# EAGLE board Steering Wheel LED Left (EAGLE 7.2.0)
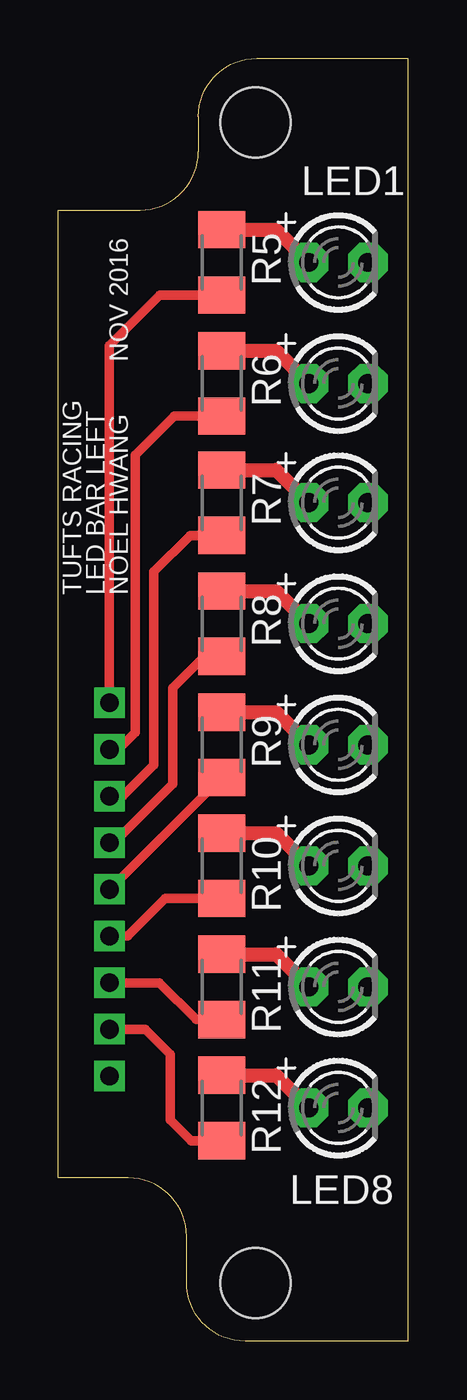
[diagram p0: board, top side]
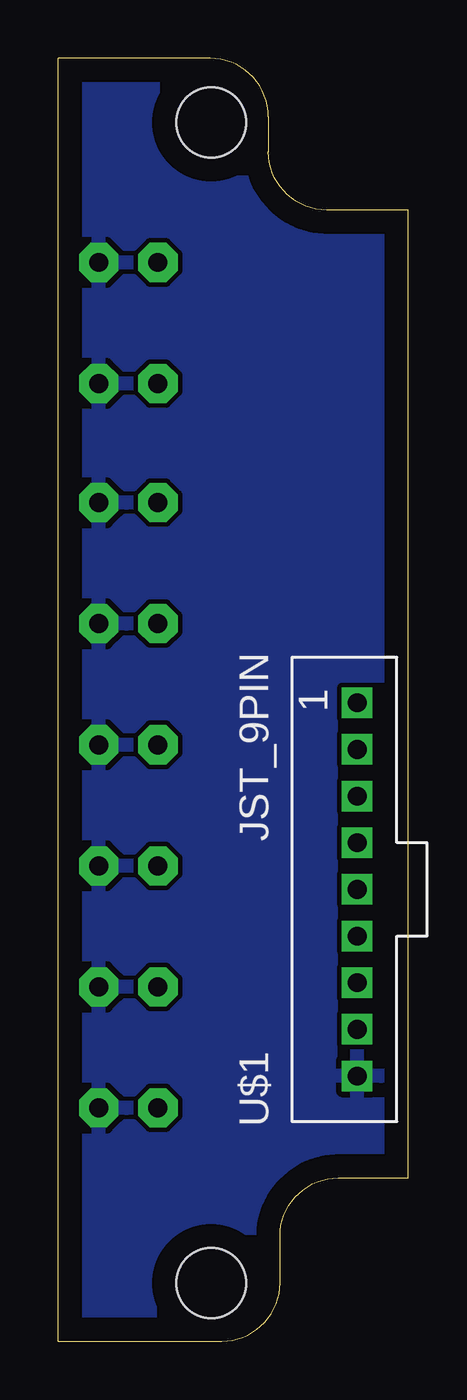
[diagram p1: board, bottom side, seen from below]

Size 15 x 55 mm. Coordinates in mm from the lower left corner, seen from the top.
Outline: 15,0 15,55 8.5,55 arc90 6,52.5 6,51 arc-90 3.5,48.5 0,48.5 0,7 3,7 arc-90 5.5,4.5 5.5,2.5 arc90 8,0 15,0
Copper layers (1*16): Top 0.035mm / dielectric 1.5mm / Bottom 0.035mm
Design rules "default": minimum track width 10mil, minimum drill 24mil, track to track 8mil, track to pad 8mil, pad to pad 8mil, via to via 8mil, smd to smd 8mil, copper to edge 40mil, drill to drill 8mil, minimum pad ring 10mil, minimum via ring 8mil, stop-mask expansion 4mil, vias tented up to drill 0mil, thermal gap 10mil
Holes 3 mm at 8.45,2.49 8.45,52.25

## Footprints (pad centres in the part's own frame; a part is rotated, then mirrored left to right if it is on the bottom)
LED3MM = drill 0.813 pad 1.676 octagon: A -1.27,0; K 1.27,0
M1206 = smd 1.6 x 2: 1 -1.4,0; 2 1.4,0
JST-PH-9-THM = drill 0.8 square: 1 8,0; 2 6,0; 3 4,0; 4 2,0; 5 0,0; 6 -2,0; 7 -4,0; 8 -6,0; 9 -8,0

## Placement (x,y rotation side)
LED1  [LED3MM]  12,46.25 0 top
LED2  [LED3MM]  12,41.06 0 top
LED3  [LED3MM]  12,35.95 0 top
LED4  [LED3MM]  12,30.76 0 top
LED5  [LED3MM]  12,25.57 0 top
LED6  [LED3MM]  12,20.38 0 top
LED7  [LED3MM]  12,15.19 0 top
LED8  [LED3MM]  12,10 0 top
R5  [M1206]  7,46.25 270 top
R6  [M1206]  7,41.06 270 top
R7  [M1206]  7,35.95 270 top
R8  [M1206]  7,30.76 270 top
R9  [M1206]  7,25.57 270 top
R10  [M1206]  7,20.38 270 top
R11  [M1206]  7,15.19 270 top
R12  [M1206]  7,10 270 top
U$1  JST_9PIN  [JST-PH-9-THM]  2.19,19.37 90 bottom

## Library data of the parts
LED1-LED8 R5-R12 U$1 = adafruit

## Nets
GND: LED1.K LED2.K LED3.K LED4.K LED5.K LED6.K LED7.K LED8.K U$1.9
N$2: LED3.A R7.1
N$3: LED2.A R6.1
N$4: LED1.A R5.1
N$5: LED4.A R8.1
N$6: LED5.A R9.1
N$7: LED6.A R10.1
N$8: LED7.A R11.1
N$9: LED8.A R12.1
N$10: R10.2 U$1.6
N$11: R5.2 U$1.1
N$12: R6.2 U$1.2
N$13: R7.2 U$1.3
N$14: R8.2 U$1.4
N$15: R9.2 U$1.5
N$16: R11.2 U$1.7
N$17: R12.2 U$1.8

## Tracks (layer width: path | path; a pad name or v marks a point on that pad's centre or on a via)
GND
  pour Bottom: -2,55 15,55 15,0 -2,0
N$2
  Top 0.61: R7.1 9.33,37.35 LED3.A
N$3
  Top 0.61: R6.1 9.33,42.46 LED2.A
N$4
  Top 0.61: R5.1 9.33,47.65 LED1.A
N$5
  Top 0.61: R8.1 9.33,32.16 LED4.A
N$6
  Top 0.61: R9.1 9.33,26.97 LED5.A
N$7
  Top 0.61: R10.1 9.33,21.78 LED6.A
N$8
  Top 0.61: R11.1 9.33,16.59 LED7.A
N$9
  Top 0.61: R12.1 9.33,11.4 LED8.A
N$10
  Top 0.406: U$1.6 2.97,17.37 4.58,18.98 R10.2
N$11
  Top 0.406: U$1.1 2.19,42.69 4.35,44.85 R5.2
N$12
  Top 0.406: U$1.2 2.57,25.37 3.3,26.1 3.3,38 4.96,39.66 R6.2
N$13
  Top 0.406: U$1.3 2.77,23.37 4.1,24.7 4.1,33 5.65,34.55 R7.2
N$14
  Top 0.406: U$1.4 2.37,21.37 4.9,23.9 4.9,28 6.2,29.3 6.94,29.3 R8.2
N$15
  Top 0.406: U$1.5 R9.2
N$16
  Top 0.406: U$1.7 4.33,15.37 5.91,13.79 R11.2
N$17
  Top 0.406: U$1.8 3.73,13.37 4.8,12.3 4.8,9.5 5.7,8.6 R12.2

## Text on the board
tNames: NOV 2016 | TUFTS RACING | LED BAR LEFT | NOEL HWANG